# Altium PCB boostmc (1).PcbDoc
Units mil, origin at the board's own origin, x right, y up, seen from the top; angles counter-clockwise.
Board outline 3211.75 x 2684.86 mil, 2 copper layers (Top Layer, Bottom Layer), stack 15.3 mil thick; 27 components, 79 nets, 205 pads, 0 vias.
Unrouted connection lines stored in the file: 59.
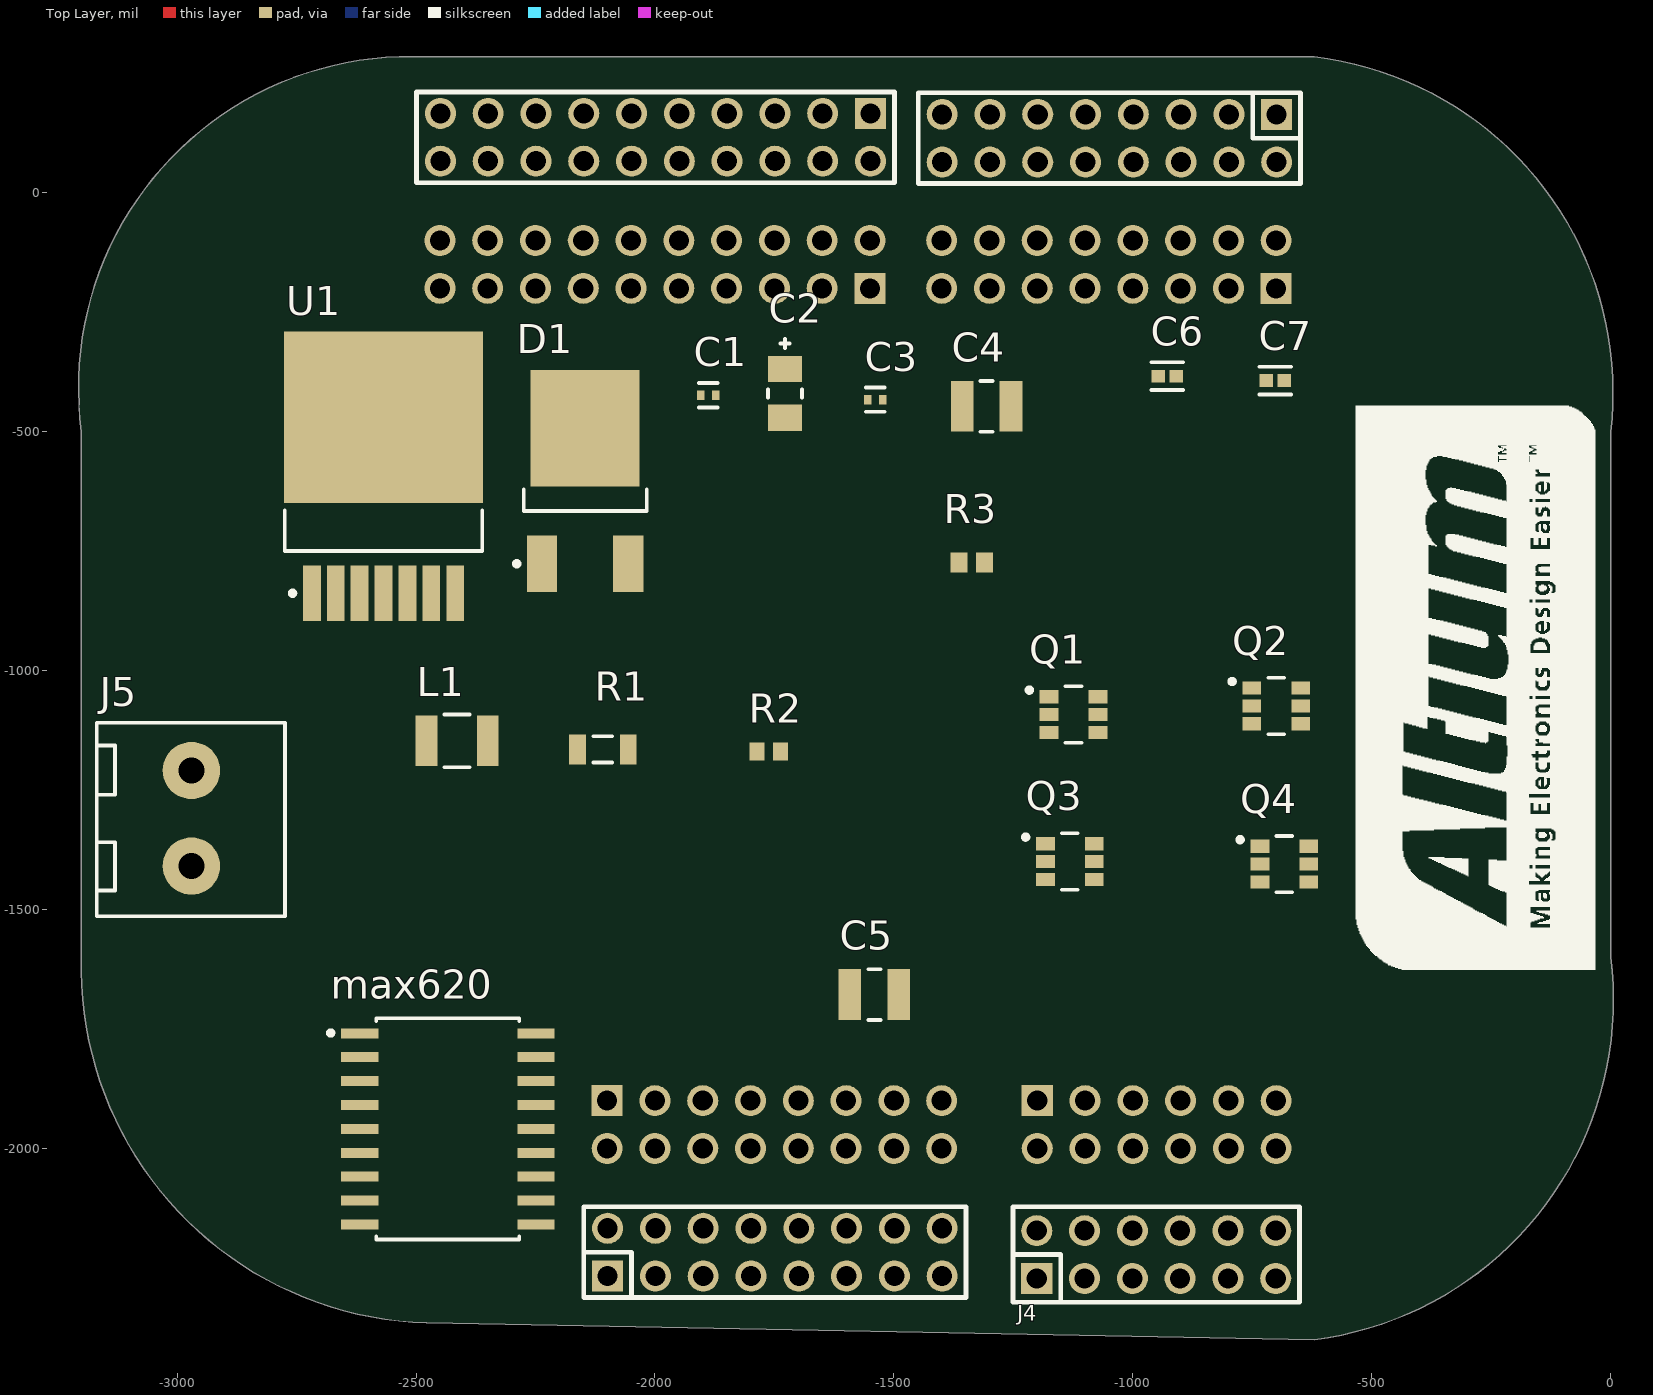
[diagram p0: Top Layer view]
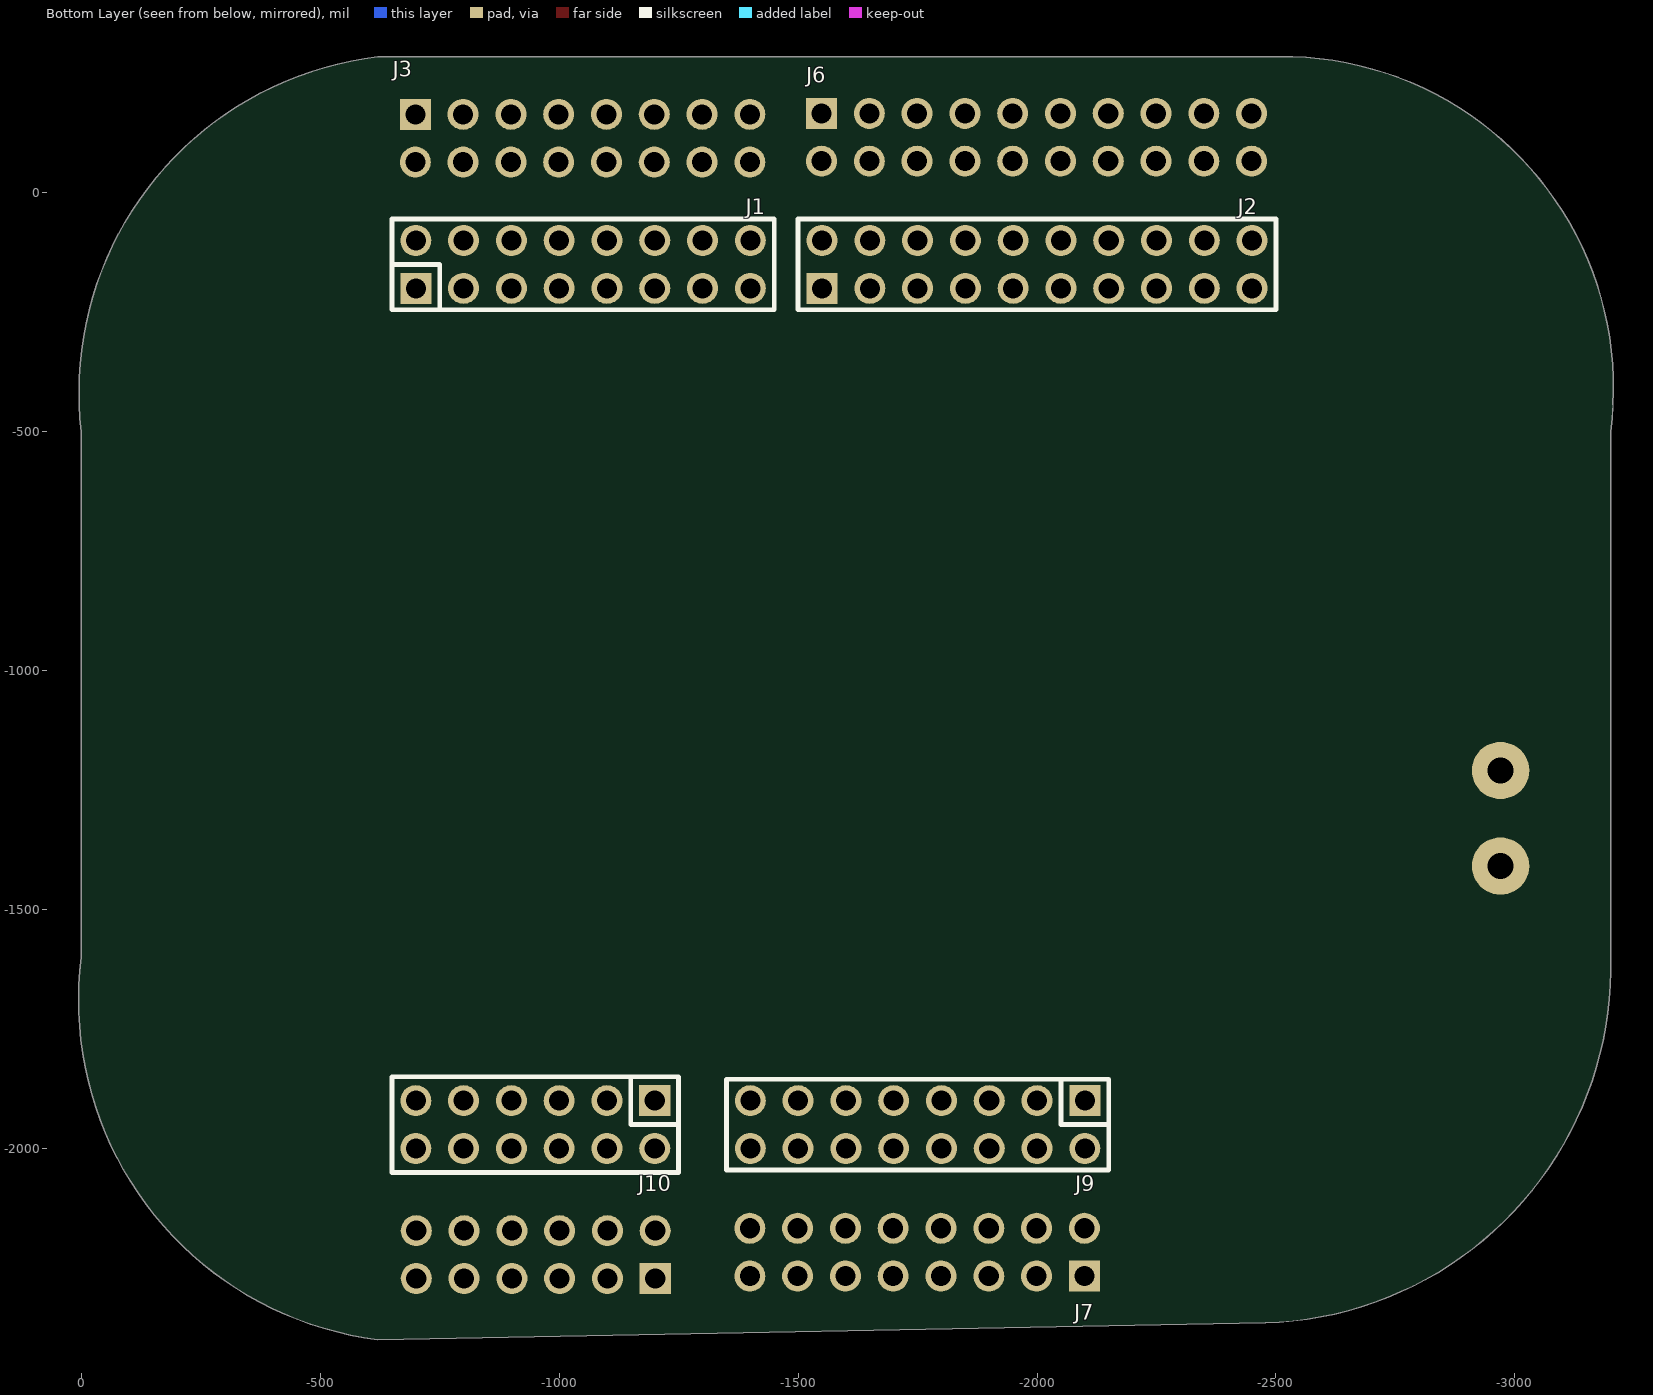
[diagram p1: Bottom Layer view, seen from below]

## Layer stack, top to bottom
Top Solder: solder mask 0.4, Solder Resist, Dk 3.5
Top Layer: signal copper 1.4
Dielectric1: core 12.5, FR-4, Dk 4.8
Bottom Layer: signal copper 1.4
Bottom Solder: solder mask 0.4, Solder Resist, Dk 3.5

## Board outline
-3200,-1600 ccw(c-2456.51,-1621.51) -2478.02,-2365 -620.19,-2400 ccw(c-710.1,-1689.91) 0,-1600 0,-500 ccw(c-702.09,-418.09) -620.19,284 -989,284 -1736,284 -2478.02,284 ccw(c-2513.25,-407.99) -3200,-500

## Design rules (kind name [scope] priority, off if disabled: settings)
Clearance Polygon [(InNet('GND') AND InPoly)] p1: gap=10 ignorepadtopadclearanceinfootprint=FALSE except(0: Arc-Hole Track-Hole SMDPad-Hole THPad-Hole Via-Hole Fill-Hole Poly-Hole Region-Hole Text-Hole)
Clearance [All] p2: gap=6 ignorepadtopadclearanceinfootprint=FALSE except(0: Arc-Hole Track-Hole SMDPad-Hole THPad-Hole Via-Hole Fill-Hole Poly-Hole Region-Hole Text-Hole)
ComponentClearance [All] p1: gap=0 collisioncheckmode=3 verticalgap=0 showdistances=FALSE
Height [All] p1: minheight=0 maxheight=1500 prefheight=500
HoleSize [All] p1: absolutevalues=TRUE maxlimit=250 minlimit=1 maxpercent=80.000 minpercent=20.000
HoleToHoleClearance [All] p1: gap=2 allowstackedmicrovias=TRUE
MinimumSolderMaskSliver [All] p1: minsoldermaskwidth=0
PlaneConnect [All] p1: planeconnectstyle=Direct reliefexpansion=20 reliefentries=4 reliefconductorwidth=10 reliefairgap=10
PolygonConnect PolygonConnect_1 [IsVia] p1: connectstyle=Direct reliefconductorwidth=10 reliefentries=4 polygonreliefangle="90 Angle" airgapwidth=10
PolygonConnect [All] p2: connectstyle=Relief reliefconductorwidth=10 reliefentries=4 polygonreliefangle="90 Angle" airgapwidth=10
RoomDefinition Connectors [InComponentClass('Connectors')] p1: confinementstyle=ConfineIn formatcopy=TRUE lockcomponents=FALSE outline -27484.74,-25608.65 -25484.74,-25608.65 -25484.74,-24608.65 -27484.74,-24608.65
RoutingVias [All] p1: holewidth=12 width=24 viastyle="Through Hole" minholewidth=12 minwidth=24 maxholewidth=50 maxwidth=100
ShortCircuit ShortCircuit_1 [HasFootprint('4-40 X 250') vs HasFootprint('4-40 X 250')] p1: allowed=TRUE
ShortCircuit [All] p2: allowed=FALSE
SilkToSilkClearance [All] p1: silktosilkclearance=0
SilkToSolderMaskClearance SilkscreenOverComponentPads [IsPad] p1: minsilkscreentomaskgap=0 clearancetoexposedcopper=TRUE
SolderMaskExpansion [All] p1: expansion=4 istentingtop=FALSE
Width [All] p1: maxlimit=100 minlimit=6 preferedwidth=6
21 further rules are at their usual default settings.

## Classes and differential pairs
component class "motorcontroller (1)": C1 C2 C3 C4 C5 C6 C7 D1 J12 L1 max620 Q1 Q2 Q3 Q4 R1 R2 R3 U1
component class Connectors: D6 J1 J2 J3 J4 J5 J6 J7 J8 J9 J10 J12 R18

## Components (designator, comment, footprint, x,y, rotation, side; value= is the part's Value field where it differs from the comment)
C1 "GRM155R71E473KA88D" FP-GRM155-0_05-MFG -1888.75,-424 r0 top value=47nF
C2 "TAJA105K025RNJ" FP-TAJA-MFG -1728,-420 r90 top
C3 "GRM155R71E473KA88D" FP-GRM155-0_05-MFG -1538.75,-433 r0 top value=47nF
C4 "22uF" FP-C1210C226K4PACTU-MFG -1306.18,-447 r0 top
C5 "22uF" FP-C1210C226K4PACTU-MFG -1540.82,-1678 r0 top
C6 "0.047uf" FP-GRM155-0_05-IPC_A -928.16,-384 r0 top
C7 "0.047uf" FP-GRM155-0_05-IPC_A -701.84,-393 r0 top
D1 "MBRD835LT4G" ONSC-DPAK-3-369C-01_V -2146,-603.24 r90 top
J1 "67996-416HLF" 67996-416HLF#1 -1050,-150 r180 bottom locked
J2 "67996-420HLF" 67996-420HLF#1 -2000,-150 r180 bottom locked
J3 "67996-416HLF" 67996-416HLF#2 -1050,116 r0 bottom
J4 "67996-412HLF" 67996-412HLF#1 -951,-2227 r180 top locked
J5 "282857-2" 282857-2 -2970,-1209 r180 top
J6 "67996-420HLF" 67996-420HLF#2 -1999,116 r0 bottom
J7 "67996-416HLF" 67996-416HLF#2 -1748,-2219 r180 bottom locked
J9 "67996-416HLF" 67996-416HLF#1 -1750,-1950 r0 bottom locked
J10 "67996-412HLF" 67996-412HLF#2 -950,-1950 r0 bottom locked
L1 "" FP-B82422A-MFG -2414,-1147 r0 top
max620 "MAX620CWN+" FP-W18-1-MFG -2433.49,-1959 r0 top
Q1 "FDC653N" FP-419BL-MFG -1124,-1092 r0 top
Q2 "FDC653N" FP-419BL-MFG -699.82,-1074 r0 top
Q3 "FDC653N" FP-419BL-MFG -1131.82,-1399.6 r0 top
Q4 "FDC653N" FP-419BL-MFG -683,-1405 r0 top
R1 "53.6k" RESC3216X60X45LL10T20 -2109,-1165 r0 top
R2 "6.19k" RESC1609X50X30NL10T20 -1761.61,-1169 r0 top
R3 "2K" RESC1609X50X30ML10T20 -1337,-774 r0 top
U1 "LT1370CR#PBF" LT-R-7_L -2568,-594.02 r90 top

## Footprints (in the part's own frame and the unit in brackets; to place one, negate y for a bottom-side part, rotate by r counter-clockwise, add the part's x,y. Pads: shape width x height; smd on the part's side, far side on the other; paste and mask are expansions set on the pad)
67996-412HLF#1 [mil] "CONN HEADER 12POS .100 STR TIN"
  rect 65x65 hole 42: 1(250,45)
  round 65 hole 42: 2(250,-55) 3(150,45) 4(150,-55) 5(50,45) 6(50,-55) 7(-50,45) 8(-50,-55) 9(-150,45) 10(-150,-55) 11(-250,45) 12(-250,-55)
  silkscreen extent -300,-105 300,95, body extent -300,-100 300,100, height 80
67996-412HLF#2 [mil] "CONN HEADER 12POS .100 STR TIN"
  rect 65x65 hole 42: 1(-250,-50)
  round 65 hole 42: 2(-250,50) 3(-150,-50) 4(-150,50) 5(-50,-50) 6(-50,50) 7(50,-50) 8(50,50) 9(150,-50) 10(150,50) 11(250,-50) 12(250,50)
  silkscreen extent -300,-100 300,100, body extent -300,-100 300,100, height 331
67996-416HLF#1 [mil] "CONN HEADER 16POS .100 STR TIN"
  rect 65x65 hole 42: 1(-350,-50)
  round 65 hole 42: 2(-350,50) 3(-250,-50) 4(-250,50) 5(-150,-50) 6(-150,50) 7(-50,-50) 8(-50,50) 9(50,-50) 10(50,50) 11(150,-50) 12(150,50) 13(250,-50) 14(250,50) 15(350,-50) 16(350,50)
  silkscreen extent -400,-95 400,95, body extent -400,-95 400,95, height 305
67996-416HLF#2 [mil] "CONN HEADER 16POS .100 STR TIN"
  rect 65x65 hole 42: 1(351,-48)
  round 65 hole 42: 2(351,52) 3(251,-48) 4(251,52) 5(151,-48) 6(151,52) 7(51,-48) 8(51,52) 9(-49,-48) 10(-49,52) 11(-149,-48) 12(-149,52) 13(-249,-48) 14(-249,52) 15(-349,-48) 16(-349,52)
  body extent -399,-93 401,97, height 305
67996-420HLF#1 [mil] "CONN HEADER 20POS .100 STR TIN"
  rect 65x65 hole 42: 1(-450,-50)
  round 65 hole 42: 2(-450,50) 3(-350,-50) 4(-350,50) 5(-250,-50) 6(-250,50) 7(-150,-50) 8(-150,50) 9(-50,-50) 10(-50,50) 11(50,-50) 12(50,50) 13(150,-50) 14(150,50) 15(250,-50) 16(250,50) 17(350,-50) 18(350,50) 19(450,-50) 20(450,50)
  silkscreen extent -500,-95 500,95, body extent -500,-95 500,95, height 305
67996-420HLF#2 [mil] "CONN 20 PIN 0.100 IN"
  rect 65x65 hole 42: 1(450,-50)
  round 65 hole 42: 2(450,50) 3(350,-50) 4(350,50) 5(250,-50) 6(250,50) 7(150,-50) 8(150,50) 9(50,-50) 10(50,50) 11(-50,-50) 12(-50,50) 13(-150,-50) 14(-150,50) 15(-250,-50) 16(-250,50) 17(-350,-50) 18(-350,50) 19(-450,-50) 20(-450,50)
  body extent -500,-95 500,95, height 305
282857-2 [mil] "TE CONNECTIVITY / BUCHANAN  282857-2  Wire-To-Board Terminal Block, 2, 300 V, 24 A, 30 AWG, 12 AWG, 3 mm²"
  round 120 hole 55: 1(0,0) 2(0,200)
  silkscreen extent -196,-100 198,305, body extent -196,-100 198,320, height 752
FP-419BL-MFG [mm]
  rect 1x0.7 smd paste+0 mask+0: 1(-1.3,0.95) 2(-1.3,0) 3(-1.3,-0.95) 4(1.3,-0.95) 5(1.3,0) 6(1.3,0.95)
  silkscreen extent -2.47,-1.5 0.43,1.5, body extent -1.9,-1.85 1.9,1.85, height 0.25
FP-B82422A-MFG [mm]
  rect 1.15x2.7 smd paste+0 mask+0: 1(-1.625,0) 2(1.625,0)
  silkscreen extent -0.67,-1.4 0.67,1.4, body extent -2.3,-1.5 2.3,1.5, height 0.25
FP-C1210C226K4PACTU-MFG [mm]
  rect 1.2x2.7 smd paste+0 mask+0: 1(-1.3,0) 2(1.3,0)
  silkscreen extent -0.33,-1.35 0.33,1.35, body extent -2,-1.5 2,1.5, height 0.25
FP-GRM155-0_05-IPC_A [mil]
  rect 28.16x26.48 smd paste+0 mask+0: 1(-18.84,0) 2(18.84,0)
  silkscreen extent -33,-29 33,29, body extent -41,-21 41,21, height 10
FP-GRM155-0_05-MFG [mm]
  rect 0.4x0.5 smd paste+0 mask+0: 1(-0.4,0) 2(0.4,0)
  silkscreen extent -0.5,-0.65 0.5,0.65, body extent -0.7,-0.38 0.7,0.38, height 0.25
FP-TAJA-MFG [mm]
  rect 1.4x1.8 smd paste+0 mask+0: 1(-1.3,0) 2(1.3,0)
  silkscreen extent -0.23,-0.9 2.9,0.9, body extent -2.1,-1 2.1,1, height 0.25
FP-W18-1-MFG [mil]
  rect 77.99x20.98 smd paste+0 mask+0: 1(-184.51,200) 2(-184.51,150) 3(-184.51,100) 4(-184.51,50) 5(-184.51,0) 6(-184.51,-50) 7(-184.51,-100) 8(-184.51,-150) 9(-184.51,-200) 10(184.51,-200) 11(184.51,-150) 12(184.51,-100) 13(184.51,-50) 14(184.51,0) 15(184.51,50) 16(184.51,100) 17(184.51,150) 18(184.51,200)
  silkscreen extent -250,-231 150,231, body extent -227,-238 227,238, height 10
LT-R-7_L [mm] "DPAK, 7-Leads, Body 10.224x8.89mm, Pitch 1.27mm, IPC High Density"
  rect 2.95x0.95 smd: 1(-6.2,3.81) 2(-6.2,2.54) 3(-6.2,1.27) 4(-6.2,0) 5(-6.2,-1.27) 6(-6.2,-2.54) 7(-6.2,-3.81)
  rect 9.1x10.6 smd: 8(3.15,0)
  silkscreen extent -6.32,-5.25 -1.8,5.25, body extent -3.95,-5.28 5.45,5.28, height 4.58
ONSC-DPAK-3-369C-01_V [mm] "DPAK, 3-Leads, Body 6.54x6.095mm, Pitch 2.29mm"
  rect 3x1.6 smd: 1(-4.4,2.29) 3(-4.4,-2.29)
  rect 6.2x5.8 smd: 4(2.8,0)
  silkscreen extent -4.52,-3.27 -0.45,3.76, body extent -1.6,-3.27 4.49,3.27, height 2.38
RESC1609X50X30ML10T20 [mm] "Chip Resistor, 2-Leads, Body 1.55x0.85mm, IPC Low Density"
  rect 0.9x1.05 smd: 1(-0.675,0) 2(0.675,0)
  body extent -0.82,-0.48 0.82,0.48, height 0.5
RESC1609X50X30NL10T20 [mm] "Chip Resistor, 2-Leads, Body 1.55x0.85mm, IPC Medium Density"
  rect 0.8x0.95 smd: 1(-0.625,0) 2(0.625,0)
  body extent -0.82,-0.48 0.82,0.48, height 0.5
RESC3216X60X45LL10T20 [mm] "Chip Resistor, 2-Leads, Body 3.20x1.60mm, IPC High Density"
  rect 0.9x1.6 smd: 1(-1.35,0) 2(1.35,0)
  silkscreen extent -0.5,-0.7 0.5,0.7, body extent -1.65,-0.85 1.65,0.85, height 0.6

## Part data
C1: library part CMP-2008-04630-5, "Chip Multilayer Ceramic Capacitors for General Purpose, 0402, 47000pF, X7R, 15%, 10%, 25V", Capacitance=47nF, Case Code (Imperial)=0402, Case Code (Metric)=1005, Dielectric=X7R, Dielectric Material=Ceramic, Manufacturer=Murata, Max Operating Temperature=125°C, Min Operating Temperature=-55°C, Package Quantity=1, Supplier Part Number=490-3254-1-ND, Tolerance=10%, Voltage=25V, Case/Package=0402, Category="Ceramic Capacitors", ComponentLink1Description=https://datasheet.ciiva.com/34302/1856425-34302854.pdf?src-supplier=Jameco, ComponentLink1URL=https://datasheet.ciiva.com/34302/1856425-34302854.pdf?src-supplier=Jameco, ComponentLink2Description=https://datasheet.ciiva.com/131/grm155r71e473ka88-01-131494.pdf?src-supplier=Digi-Key, ComponentLink2URL=https://datasheet.ciiva.com/131/grm155r71e473ka88-01-131494.pdf?src-supplier=Digi-Key, ComponentLink3Description=https://datasheet.ciiva.com/18184/getdatasheetpartid-153136-18184712.pdf?src-supplier=Verical, ComponentLink3URL=https://datasheet.ciiva.com/18184/getdatasheetpartid-153136-18184712.pdf?src-supplier=Verical, ComponentLink4Description=https://datasheet.ciiva.com/29199/454180-da-01-en-vs-kondensator-0402-29199826.pdf?src-supplier=Conrad, ComponentLink4URL=https://datasheet.ciiva.com/29199/454180-da-01-en-vs-kondensator-0402-29199826.pdf?src-supplier=Conrad, ComponentLink5Description=https://datasheet.ciiva.com/14103/grmseries-highdielectrictype-eng-14103754.pdf?src-supplier=Distrelec, ComponentLink5URL=https://datasheet.ciiva.com/14103/grmseries-highdielectrictype-eng-14103754.pdf?src-supplier=Distrelec, ComponentLink6Description=https://datasheet.ciiva.com/7937/608985-7937623.pdf?src-supplier=Element14, ComponentLink6URL=https://datasheet.ciiva.com/7937/608985-7937623.pdf?src-supplier=Element14, ComponentLink7Description=https://datasheet.ciiva.com/131/grm155r71e473ka88-01-131493.pdf?src-supplier=Digi-Key, ComponentLink7URL=https://datasheet.ciiva.com/131/grm155r71e473ka88-01-131493.pdf?src-supplier=Digi-Key, ComponentLink8Description=https://datasheet.ciiva.com/131/grm155r71e473ka88-01-131492.pdf?src-supplier=Digi-Key, ComponentLink8URL=https://datasheet.ciiva.com/131/grm155r71e473ka88-01-131492.pdf?src-supplier=Digi-Key, ComponentLink9Description=https://datasheet.ciiva.com/5424/product-5424844.pdf?src-supplier=Mouser, ComponentLink9URL=https://datasheet.ciiva.com/5424/product-5424844.pdf?src-supplier=Mouser, ComponentLink10Description=https://datasheet.ciiva.com/2989/product-2989395.pdf?src-supplier=Avnet, ComponentLink10URL=https://datasheet.ciiva.com/2989/product-2989395.pdf?src-supplier=Avnet, ComponentLink11Description=https://datasheet.ciiva.com/16213/product-16213823.pdf?src-supplier=Future+Electronics, ComponentLink11URL=https://datasheet.ciiva.com/16213/product-16213823.pdf?src-supplier=Future+Electronics, ComponentLink12Description=https://datasheet.ciiva.com/28682/1851736-28682412.pdf?src-supplier=Element14, ComponentLink12URL=https://datasheet.ciiva.com/28682/1851736-28682412.pdf?src-supplier=Element14, ComponentLink13Description=https://datasheet.ciiva.com/14606/70095383-14606023.pdf?src-supplier=Allied+Electronics, ComponentLink13URL=https://datasheet.ciiva.com/14606/70095383-14606023.pdf?src-supplier=Allied+Electronics, Construction=Flat, Depth=0.5mm, Height=0.5mm, Lead Free="Lead Free", Length=1mm, Manufacturer Part Number=GRM155R71E473KA88D, Material=Ceramic, Mount="Surface Mount", Mounting Technology="Surface Mount", Number of Pins=2, Packaging="Tape and Reel", Pins=2, Pricing="1=0.10000, 10=0.02300, 50=0.01280, 100=0.01040, 500=0.00742, 1000=0.00583, 2500=0.00530, 5000=0.00488 (USD)", Radiation Hardening=No, REACH SVHC="No SVHC", Reach SVHC Compliant=Yes, RoHS=Yes, RoHS Compliant=Yes, Series=GRM, Stock=3498266, Supplier=Digi-Key, Termination=SMD/SMT, Thickness=0.022inch, Voltage Rating=25V, Voltage Rating (DC)=25V, Weight=0.000571oz, Width=0.02inch
C2: library part CMP-04424-000374-1, "1uF 25V  ±10% 8Ω 1206  SMD Tantalum Capacitor", Capacitance=1uF, Case Code (Imperial)=1206, Case Code (Metric)=3216, Dielectric=X7R, Dielectric Material=Tantalum, ESR (Equivalent Series Resistance)=8R, Leakage Current=500nA, Max Operating Temperature=125°C, Min Operating Temperature=-55°C, Package Quantity=1, Tolerance=20%, Voltage=25V, Case/Package=1206, Construction=Flat, Depth=1.6mm, Dissipation Factor=4%, Features="General Purpose", Height=1.6mm, Height - Seated (Max)=0.071inch, Lead Free="Lead Free", Length=3.2mm, Mount="Surface Mount", Number of Pins=2, Packaging="Tape and Reel", Polarity=Polar, Radiation Hardening=No, REACH SVHC="No SVHC", RoHS Compliant=Yes, Series=TAJ, Termination=SMD/SMT, Voltage Rating=25V, Voltage Rating (DC)=25V, Weight=0.000571oz, Width=1.6mm
C3: library part CMP-2008-04630-5, "Chip Multilayer Ceramic Capacitors for General Purpose, 0402, 47000pF, X7R, 15%, 10%, 25V", Capacitance=47nF, Case Code (Imperial)=0402, Case Code (Metric)=1005, Dielectric=X7R, Manufacturer=Murata, Max Operating Temperature=125°C, Min Operating Temperature=-55°C, Package Quantity=1, Supplier Part Number=490-3254-1-ND, Tolerance=10%, Voltage=25V, Case/Package=0402, Category="Ceramic Capacitors", ComponentLink1Description=https://datasheet.ciiva.com/34302/1856425-34302854.pdf?src-supplier=Jameco, ComponentLink1URL=https://datasheet.ciiva.com/34302/1856425-34302854.pdf?src-supplier=Jameco, ComponentLink2Description=https://datasheet.ciiva.com/131/grm155r71e473ka88-01-131494.pdf?src-supplier=Digi-Key, ComponentLink2URL=https://datasheet.ciiva.com/131/grm155r71e473ka88-01-131494.pdf?src-supplier=Digi-Key, ComponentLink3Description=https://datasheet.ciiva.com/18184/getdatasheetpartid-153136-18184712.pdf?src-supplier=Verical, ComponentLink3URL=https://datasheet.ciiva.com/18184/getdatasheetpartid-153136-18184712.pdf?src-supplier=Verical, ComponentLink4Description=https://datasheet.ciiva.com/29199/454180-da-01-en-vs-kondensator-0402-29199826.pdf?src-supplier=Conrad, ComponentLink4URL=https://datasheet.ciiva.com/29199/454180-da-01-en-vs-kondensator-0402-29199826.pdf?src-supplier=Conrad, ComponentLink5Description=https://datasheet.ciiva.com/14103/grmseries-highdielectrictype-eng-14103754.pdf?src-supplier=Distrelec, ComponentLink5URL=https://datasheet.ciiva.com/14103/grmseries-highdielectrictype-eng-14103754.pdf?src-supplier=Distrelec, ComponentLink6Description=https://datasheet.ciiva.com/7937/608985-7937623.pdf?src-supplier=Element14, ComponentLink6URL=https://datasheet.ciiva.com/7937/608985-7937623.pdf?src-supplier=Element14, ComponentLink7Description=https://datasheet.ciiva.com/131/grm155r71e473ka88-01-131493.pdf?src-supplier=Digi-Key, ComponentLink7URL=https://datasheet.ciiva.com/131/grm155r71e473ka88-01-131493.pdf?src-supplier=Digi-Key, ComponentLink8Description=https://datasheet.ciiva.com/131/grm155r71e473ka88-01-131492.pdf?src-supplier=Digi-Key, ComponentLink8URL=https://datasheet.ciiva.com/131/grm155r71e473ka88-01-131492.pdf?src-supplier=Digi-Key, ComponentLink9Description=https://datasheet.ciiva.com/5424/product-5424844.pdf?src-supplier=Mouser, ComponentLink9URL=https://datasheet.ciiva.com/5424/product-5424844.pdf?src-supplier=Mouser, ComponentLink10Description=https://datasheet.ciiva.com/2989/product-2989395.pdf?src-supplier=Avnet, ComponentLink10URL=https://datasheet.ciiva.com/2989/product-2989395.pdf?src-supplier=Avnet, ComponentLink11Description=https://datasheet.ciiva.com/16213/product-16213823.pdf?src-supplier=Future+Electronics, ComponentLink11URL=https://datasheet.ciiva.com/16213/product-16213823.pdf?src-supplier=Future+Electronics, Construction=Flat, Depth=0.5mm, Height=0.5mm, Lead Free="Lead Free", Length=1mm, Manufacturer Part Number=GRM155R71E473KA88D, Material=Ceramic, Mount="Surface Mount", Mounting Technology="Surface Mount", Number of Pins=2, Packaging="Tape and Reel", Pins=2, Pricing="1=0.10000, 10=0.02300, 50=0.01280, 100=0.01040, 500=0.00742, 1000=0.00583, 2500=0.00530, 5000=0.00488 (USD)", Radiation Hardening=No, REACH SVHC="No SVHC", Reach SVHC Compliant=Yes, RoHS=Yes, RoHS Compliant=Yes, Series=GRM, Stock=3498266, Supplier=Digi-Key, Termination=SMD/SMT, Thickness=0.022inch, Voltage Rating=25V, Voltage Rating (DC)=25V, Width=0.02inch
C4 C5: library part CMP-03020-034645-1, "CAP CER 22UF 16V X5R 1210", Case Code (Imperial)=1210, Case Code (Metric)=3225, Dielectric=X5R, Dielectric Material=Ceramic, Max Operating Temperature=85°C, Min Operating Temperature=-55°C, Tolerance=10%, Voltage=16V, Capacitance=22uF, Case/Package=1210, Construction=Flat, Depth=2.5mm, Height=1.85mm, Lead Free="Lead Free", Length=3.2mm, Mount="Surface Mount", Packaging="Tape and Reel", Radiation Hardening=No, RoHS Compliant=Yes, Termination=SMD/SMT, Voltage Rating=16V, Voltage Rating (DC)=16V
C6 C7: library part CMP-2008-04595-2, "Chip Multilayer Ceramic Capacitors for General Purpose, 0402, 47000pF, X7R, 15%, 10%, 10V", Capacitance=47nF, Case Code (Imperial)=0402, Case Code (Metric)=1005, Dielectric=X7R, Max Operating Temperature=125°C, Min Operating Temperature=-55°C, Package Quantity=1, Tolerance=10%, Voltage=10V, Case/Package=0402, Depth=0.5mm, Height=0.5mm, Lead Free="Lead Free", Length=1mm, Material=Ceramic, Mount="Surface Mount", Packaging="Tape and Reel", Radiation Hardening=No, REACH SVHC="No SVHC", Termination=SMD/SMT, Thickness=0.022inch, Voltage Rating=10V, Voltage Rating (DC)=10V, Width=0.5mm
D1: library part CMP-1055-00173-1, "SWITCHMODE(TM) Power Rectifier, 3-Pin DPAK, Pb-Free, Tape and Reel", Manufacturer="On Semiconductor", ComponentLink1Description="Manufacturer URL", ComponentLink1URL=http://www.onsemi.com/, ComponentLink2Description=Datasheet, ComponentLink2URL=http://www.onsemi.cn/pub_link/Collateral/MBRD835L-D.PDF, ComponentLink3Description="Package Specification", ComponentLink3URL=http://www.onsemi.cn/pub_link/Collateral/369C.PDF, Configuration=Single, DatasheetVersion="Rev. 11", IFSM Max (A)=75, Mounting Technology="Surface Mount", PackageDescription="3-Pin Flange Mount, Body 6.54 x 6.095 mm, Pitch 2.29 mm", PackageReference=DPAK-3-369C-01, PackageVersion="Rev. E, 02/2014", Packing="Tape and Reel", PartNumber=MBRD835LT4G, RoHS=TRUE
J1 J9: "CONN HEADER 16POS .100 STR TIN", Color=Black, Manufacturer=FCI, Supplier Part Number 1=609-3220-ND, Category="Connectors, Interconnects", ComponentLink1Description=http://portal.fciconnect.com/Comergent//fci/drawing/67996.pdf, ComponentLink1URL=http://portal.fciconnect.com/Comergent//fci/drawing/67996.pdf, Connector Type="Header, Unshrouded", Contact Finish=Tin, Contact Finish Thickness="100µin (2.54µm)", Contact Mating Length="0.230\" (5.84mm)", Contact Type="Male Pin", Fastening Type=-, Features=-, Manufacturer Part Number=67996-416HLF, Mounting Type="Through Hole", Number of Positions=16, Number of Positions Loaded=All, Number of Rows=2, Packaging=Bulk, Pitch="0.100\" (2.54mm)", Pricing 1="1=0.56, 10=0.521, 25=0.4684, 50=0.4164, 100=0.3991, 250=0.36436, 500=0.347, 1000=0.28628, 2500=0.26025 (USD)", RoHS="RoHS Compliant", Row Spacing="0.100\" (2.54mm)", Stock 1=1589, Supplier 1=Digi-Key, Termination=Solder
J2: "CONN HEADER 20POS .100 STR TIN", Color=Black, Manufacturer=FCI, Supplier Part Number 1=609-3221-ND, Category="Connectors, Interconnects", ComponentLink1Description=http://portal.fciconnect.com/Comergent//fci/drawing/67996.pdf, ComponentLink1URL=http://portal.fciconnect.com/Comergent//fci/drawing/67996.pdf, Connector Type="Header, Unshrouded", Contact Finish=Tin, Contact Finish Thickness="100µin (2.54µm)", Contact Mating Length="0.230\" (5.84mm)", Contact Type="Male Pin", Fastening Type=-, Features=-, Manufacturer Part Number=67996-420HLF, Mounting Type="Through Hole", Number of Positions=20, Number of Positions Loaded=All, Number of Rows=2, Packaging=Bulk, Pitch="0.100\" (2.54mm)", Pricing 1="1=0.66, 10=0.619, 25=0.5572, 50=0.4952, 100=0.4745, 250=0.43324, 500=0.4126, 1000=0.3404, 2500=0.30945 (USD)", RoHS="RoHS Compliant", Row Spacing="0.100\" (2.54mm)", Stock 1=596, Supplier 1=Digi-Key, Termination=Solder
J3 J7: "CONN HEADER 16POS .100 STR TIN", Supplier Part Number 1="Mouser - 649-67996-416HLF", Supplier 1=Octopart
J4: "CONN HEADER 12POS .100 STR TIN", Supplier Part Number 1="Mouser - 649-67996-412HLF", Supplier 1=Octopart
J5: "TERM BLOCK 2POS SIDE ENT 5.08MM", Color=Green, Current=24A, Manufacturer="TE Connectivity", Operating Temperature=-, Supplier Part Number 1=A98359-ND, Voltage=300V, Category="Connectors, Interconnects", Clamp Material - Plating="Brass - Nickel Plated", ComponentLink1Description=http://documents.tycoelectronics.com/commerce/DocumentDelivery/DDEController?Action=srchrtrv&DocNm=282857&DocType=CD&DocLang=EN, ComponentLink1URL=http://documents.tycoelectronics.com/commerce/DocumentDelivery/DDEController?Action=srchrtrv&DocNm=282857&DocType=CD&DocLang=EN, Contact Material - Plating="Brass - Tin Plated", Features="Interlocking (Side)", Housing Material="Polyamide (PA66), Nylon 6/6", Manufacturer Part Number=282857-2, Mating Orientation="Horizontal with Board", Mounting Type="Through Hole", Number of Levels=1, Packaging=Bulk, Pitch="0.200\" (5.08mm)", Positions Per Level=2, Pricing 1="1=1.19, 10=1.046, 25=0.984, 50=0.9432, 100=0.9021, 250=0.82012, 500=0.7381, 1000=0.65608, 2500=0.59457 (USD)", RoHS="RoHS Compliant", Screw Material - Plating="Brass - Nickel Plated", Screw Thread=M3, Stock 1=1811, Supplier 1=Digi-Key, Torque - Screw="0.79 Nm (7.0 Lb-In)", Wire Gauge="12-30 AWG", Wire Termination="Screw - Rising Cage Clamp"
J6: "CONN HEADER 20POS .100 STR TIN", Supplier Part Number 1="Mouser - 649-67996-420HLF", Supplier 1=Octopart
J10: "CONN HEADER 12POS .100 STR TIN", Color=Black, Manufacturer=FCI, Supplier Part Number 1=609-3219-ND, Category="Connectors, Interconnects", ComponentLink1Description=http://portal.fciconnect.com/Comergent//fci/drawing/67996.pdf, ComponentLink1URL=http://portal.fciconnect.com/Comergent//fci/drawing/67996.pdf, Connector Type="Header, Unshrouded", Contact Finish=Tin, Contact Finish Thickness="100µin (2.54µm)", Contact Mating Length="0.230\" (5.84mm)", Contact Type="Male Pin", Fastening Type=-, Features=-, Manufacturer Part Number=67996-412HLF, Mounting Type="Through Hole", Number of Positions=12, Number of Positions Loaded=All, Number of Rows=2, Packaging=Bulk, Pitch="0.100\" (2.54mm)", Pricing 1="1=0.4, 10=0.379, 25=0.3248, 50=0.276, 100=0.2651, 250=0.23804, 500=0.22722, 1000=0.18935, 2500=0.17312 (USD)", RoHS="RoHS Compliant", Row Spacing="0.100\" (2.54mm)", Stock 1=1044, Supplier 1=Digi-Key, Termination=Solder
L1: library part CMP-2000-05912-2, "FIXED IND 10UH 180MA 1.6 OHM SMD", Case Code (Imperial)=1210, Case Code (Metric)=3225, Current Rating=180mA, DC Resistance (DCR)=1.6R, Inductance=10uH, Inductance Tolerance=10%, Max Operating Temperature=125°C, Package Quantity=2000, Ratings=AEC-Q200, Resistor Type=Wirewound, Self Resonant Frequency=25MHz, Test Frequency=1MHz, Case/Package=1210, Contact Plating=Tin, Core Material=Ferrite, DC Current=180mA, Depth=2.8mm, Height=2.1mm, Height - Seated (Max)=0.083inch, Lead Free="Lead Free", Length=3.5mm, Max DC Current=180mA, Military Standard=Not, Mount="Surface Mount", Number of Pins=2, Packaging="Tape and Reel", Q Factor=27, Radiation Hardening=No, Rated Current-Max=180mA, REACH SVHC="No SVHC", RoHS Compliant=Yes, Series=SIMID, Series Resistance=1.6R, Shielding=Unshielded, Termination=SMD/SMT, Tolerance=10%, Weight=0.001764oz, Width=0.098inch
max620: library part CMP-05716-000008-1, "IC GATE DRVR HIGH-SIDE 18SOIC", Case/Package=SOIC, Manufacturer=Maxim, Max Operating Temperature=70°C, Max Output Current=25mA, Max Power Dissipation=762mW, Max Supply Current=500uA, Max Supply Voltage=16.5V, Min Operating Temperature=0°C, Min Supply Voltage=4.5V, Package Quantity=40, Supplier Part Number=MAX620CWN+-ND, Category="Gate Drivers", ComponentLink1Description=https://datasheet.ciiva.com/3226/max620-max621-3226474.pdf?src-supplier=Avnet, ComponentLink1URL=https://datasheet.ciiva.com/3226/max620-max621-3226474.pdf?src-supplier=Avnet, ComponentLink2Description=https://datasheet.ciiva.com/1953/max620-max621-1953819.pdf?src-supplier=Digi-Key, ComponentLink2URL=https://datasheet.ciiva.com/1953/max620-max621-1953819.pdf?src-supplier=Digi-Key, Fall Time=2500ns, Lead Free="Lead Free", Manufacturer Part Number=MAX620CWN+, Mount="Surface Mount", Mounting Technology="Surface Mount", Nominal Supply Current=500uA, Number of Drivers=4, Number of Outputs=4, Number of Pins=18, Packaging=Rail/Tube, Pins=18, Pricing="1=11.21000, 10=10.12600, 25=9.65560, 100=8.38380, 250=8.00700, 500=7.30050, 1000=7.06500 (USD)", Radiation Hardening=No, Rise Time=1700ns, RoHS=Yes, RoHS Compliant=Yes, Series=-, Stock=120, Supplier=Digi-Key, Supply Current=500uA
Q1 Q2 Q3 Q4: library part CMP-07173-000050-1, "MOSFET N-CH 30V 5A SSOT-6", Continuous Drain Current=5A, Drain To Source Breakdown Voltage=30V, Drain To Source Resistance=0.027Ω, Gate To Source Voltage=20V, Input Capacitace At Vds="350pF @ 15V", Manufacturer="ON Semiconductor", Max Forward Diode Voltage=1.2V, Max Junction Temp=+150°C, Package=419BL, Power Dissipation=1.6W, Pulse Drain Current=15A, Temperature="-55°C to +150°C", Temperature Range Low=-55°C, Typ Forward Diode Voltage=0.75V, Automotive=No, Category=Trans, ComponentLink2Description=Datasheet, ComponentLink2URL=https://www.onsemi.com/pub/Collateral/FDC653N-D.pdf, Depletion Mode=False, Device Class L1="Discrete Semiconductors", Device Class L2=Transistors, Device Class L3=MOSFETs, Digikey Description="MOSFET N-CH 30V 5A SSOT-6", Drain To Source Voltage=30V, Footprint Url=https://www.onsemi.com/pub/Collateral/419BL.PDF, Gate Charge At Vgs="12nC @ 10V", Height=1.1mm, Ipc Land Pattern Name=SOT95P280X100-6, Lead Free=Yes, Manufacturer Part Number=FDC653N, Mouser Description="Supplied as a Tape, FDC653N N-Channel MOSFET, 5 A, 30 V, 6-Pin SOT-23 ON Semiconductor", Number Of Channels=1, Number Of N Channels=1, Octopart=https://octopart.com/fdc653n-on+semiconductor-84325763, RoHS=TRUE, Rthja Max=78°C/W, Standoff Height=0mm, Temperature Range High=+150°C, Threshold Vgs Max=2V, Threshold Vgs Min=1V, Transconductance=6.2S, Turn Off Delay Time=13ns, Turn On Delay Time=7.5ns
R1: library part CMP-2003-02270-1, Manufacturer="Vishay Dale", Part Number=CRCW120653K6FKEA
R2: library part CMP-1012-00600-2, Manufacturer="Vishay Dale", Part Number=CRCW06036K19FKEA
R3: library part CMP-2000-03159-1, Manufacturer="Vishay Dale", Part Number=CRCW06032K00FKEA
U1: library part CMP-0491-01357-1, "500 kHz High Efficiency 6 A Switching Regulator, 7-pin DPAK (R-7), 0 to 125 degC, Pb-Free", Average Rectified Current=8A, Case/Package=DPAK, Forward Voltage=510mV, Frequency Sync Range="600kHz - 800kHz", Manufacturer="Linear Technology", Manufacturer Part Number=MBRD835LT4G, Max Forward Surge Current (Ifsm)=75A, Max Operating Temperature=150°C, Max Repetitive Reverse Voltage (Vrrm)=35V, Max Reverse Current=1.4mA, Min Operating Temperature=-65°C, Package Quantity=2500, Supplier Part Number=MBRD835LT4GOSTR-ND, Category="Schottky Diodes", ComponentLink1Description="Manufacturer URL", ComponentLink1URL=http://www.linear.com/, ComponentLink2Description=Datasheet, ComponentLink2URL=http://cds.linear.com/docs/en/datasheet/1370fs.pdf, ComponentLink3Description="Package Specification", ComponentLink3URL=http://cds.linear.com/docs/en/packaging/05081462_F_R.pdf, ComponentLink4Description=https://datasheet.ciiva.com/916/mbrd835l-d-916160.pdf?src-supplier=Avnet, ComponentLink4URL=https://datasheet.ciiva.com/916/mbrd835l-d-916160.pdf?src-supplier=Avnet, ComponentLink5Description=https://datasheet.ciiva.com/916/mbrd835l-d-916160.pdf?src-supplier=Digi-Key, ComponentLink5URL=https://datasheet.ciiva.com/916/mbrd835l-d-916160.pdf?src-supplier=Digi-Key, ComponentLink6Description=https://datasheet.ciiva.com/27051/925901-27051005.pdf?src-supplier=Jameco, ComponentLink6URL=https://datasheet.ciiva.com/27051/925901-27051005.pdf?src-supplier=Jameco, ComponentLink7Description=https://datasheet.ciiva.com/22659/1708271-22659052.pdf?src-supplier=Element14, ComponentLink7URL=https://datasheet.ciiva.com/22659/1708271-22659052.pdf?src-supplier=Element14, ComponentLink8Description=https://datasheet.ciiva.com/8299/mbrd835l-d-8299944.pdf?src-supplier=Avnet, ComponentLink8URL=https://datasheet.ciiva.com/8299/mbrd835l-d-8299944.pdf?src-supplier=Avnet, ComponentLink9Description=https://datasheet.ciiva.com/16446/mbrd835l-d-16446810.pdf?src-supplier=Future+Electronics, ComponentLink9URL=https://datasheet.ciiva.com/16446/mbrd835l-d-16446810.pdf?src-supplier=Future+Electronics, ComponentLink10Description=https://datasheet.ciiva.com/15144/getdatasheetpartid-88353-15144619.pdf?src-supplier=Verical, ComponentLink10URL=https://datasheet.ciiva.com/15144/getdatasheetpartid-88353-15144619.pdf?src-supplier=Verical, ComponentLink11Description=https://datasheet.ciiva.com/916/mbrd835l-d-916161.pdf?src-supplier=Digi-Key, ComponentLink11URL=https://datasheet.ciiva.com/916/mbrd835l-d-916161.pdf?src-supplier=Digi-Key, ComponentLink12Description=https://datasheet.ciiva.com/916/mbrd835l-d-916162.pdf?src-supplier=Digi-Key, ComponentLink12URL=https://datasheet.ciiva.com/916/mbrd835l-d-916162.pdf?src-supplier=Digi-Key, Contact Plating=Tin,Matte, Current Rating=8A, Element Configuration=Single, Forward Current=8A, Halogen Free="Halogen Free", Height=2.38mm, Lead Free="Lead Free", Length=6.73mm, Max Reverse Leakage Current=1.4mA, Max Reverse Voltage (DC)=35V, Max Surge Current=75A, Mounting Technology="Surface Mount", Number of Outputs=1, Output Current=8A, PackageDescription="7-Pin Plastic DD Pak, Body 10.2235 x 8.89 mm, Pitch 1.27 mm", PackageReference=R-7, PackageVersion="Rev. F, 05/2012", Packaging="Tape and Reel", PartNumber=LT1370CR#PBF, Peak Non-Repetitive Surge Current=75A, Pins=3, Polarity=Standard, Pricing="2500=0.35904, 5000=0.33428, 12500=0.32190, 25000=0.31069 (USD)", Radiation Hardening=No, Reach SVHC Compliant=Yes, RoHS=TRUE, RoHS Compliant=Yes, Series=SWITCHMODE™, Supplier=Digi-Key, Termination=SMD/SMT, Voltage Rating (DC)=35V, Width=6.22mm

## Nets (pads, with @x,y where several pads share a name; then routed paths per layer and width w, separated by ;. In a path a pad name is that pad's centre, name@x,y a point inside that pad or via, vN(x,y) a via of type N, cw(c..) or ccw(c..) an arc to the next point about the centre after c; other vN are vias at no path point)
+3.3V: J9.4 J9.8
+V_BATTERY: C4.2 J9.16 L1.1 U1.7
c: J5.1
GND: C4.1 C5.1 C7.2 D1.3 J2.14 J5.2 J9.12 J9.14 max620.5 max620.7 Q3.4 Q4.4 R2.1 R3.1 U1.3 U1.4 U1.6 U1.8
NetC1_1: C1.1 max620.11
NetC1_2: C1.2 max620.10
NetC2_1: C2.1 max620.12
NetC2_2: C2.2 max620.8
NetC3_1: C3.1 max620.9
NetC3_2: C3.2 max620.13
NetC5_2: C5.2 D1.4 R1.1
NetC6_1: C6.1 C7.1 U1.1
NetC6_2: C6.2 R3.2
NetD1_1: D1.1 L1.2 U1.5
NetJ12_1: Q1.4 Q3.1 Q3.2 Q3.5 Q3.6
NetJ12_2: Q2.4 Q4.1 Q4.2 Q4.5 Q4.6
Netmax620_2: max620.2 Q3.3
Netmax620_17: max620.17 Q4.3
NetQ1_1: Q1.1 Q1.2 Q1.5 Q1.6 Q2.1 Q2.2 Q2.5 Q2.6
NetR1_2: R1.2 R2.2 U1.2
OUT1: max620.18 Q1.3
OUT4: max620.1 Q2.3
P5V_USB: J9.10
PTA1: J1.2
PTA2: J1.4
PTA4: J1.10
PTA5: J1.12 max620.4
PTA12: J1.8
PTA13: J2.2
PTA16: J2.9
PTA17: J2.11
PTB0: J10.2
PTB1: J10.4
PTB2: J10.6
PTB3: J10.8
PTB8: J9.1
PTB9: J9.3
PTB10: J9.5
PTB11: J9.7
PTC0: J1.3
PTC1: J10.12
PTC2: J10.10 max620.16
PTC3: J1.5
PTC4: J1.7
PTC5: J1.9
PTC6: J1.11
PTC7: J1.1
PTC8: J1.14 max620.3
PTC9: J1.16
PTC10: J1.13
PTC11: J1.15
PTC12: J2.1
PTC13: J2.3
PTC16: J2.5
PTC17: J2.7
PTD0: J2.6
PTD1: J2.12
PTD2: J2.8
PTD3: J2.10
PTD4: J1.6
PTD5: J2.4
PTD6: J2.17
PTD7: J2.19
PTE0: J2.18
PTE1: J2.20
PTE2: J9.9
PTE3: J9.11
PTE4: J9.13
PTE5: J9.15
PTE20: J10.1
PTE21: J10.3
PTE22: J10.5
PTE23: J10.7
PTE29: J10.9
PTE30: J10.11 max620.15
PTE31: J2.13
RESET/PTA20: J9.6
SDA_PTD5: J9.2
VREFH: J2.16
pads on no net: J2.15 J3.1 J3.2 J3.3 J3.4 J3.5 J3.6 J3.7 J3.8 J3.9 J3.10 J3.11 J3.12 J3.13 J3.14 J3.15 J3.16 J4.1 J4.2 J4.3 J4.4 J4.5 J4.6 J4.7 J4.8 J4.9 J4.10 J4.11 J4.12 J6.1 J6.2 J6.3 J6.4 J6.5 J6.6 J6.7 J6.8 J6.9 J6.10 J6.11 J6.12 J6.13 J6.14 J6.15 J6.16 J6.17 J6.18 J6.19 J6.20 J7.1 J7.2 J7.3 J7.4 J7.5 J7.6 J7.7 J7.8 J7.9 J7.10 J7.11 J7.12 J7.13 J7.14 J7.15 J7.16 max620.6 max620.14

## Silkscreen, mask and mechanical layers (free items; w line width, h text height)
Top Overlay:
  drawing of 1840 lines, arcs and shapes, not listed